# EAGLE board OLM-sensorBoardA (EAGLE 6.4)
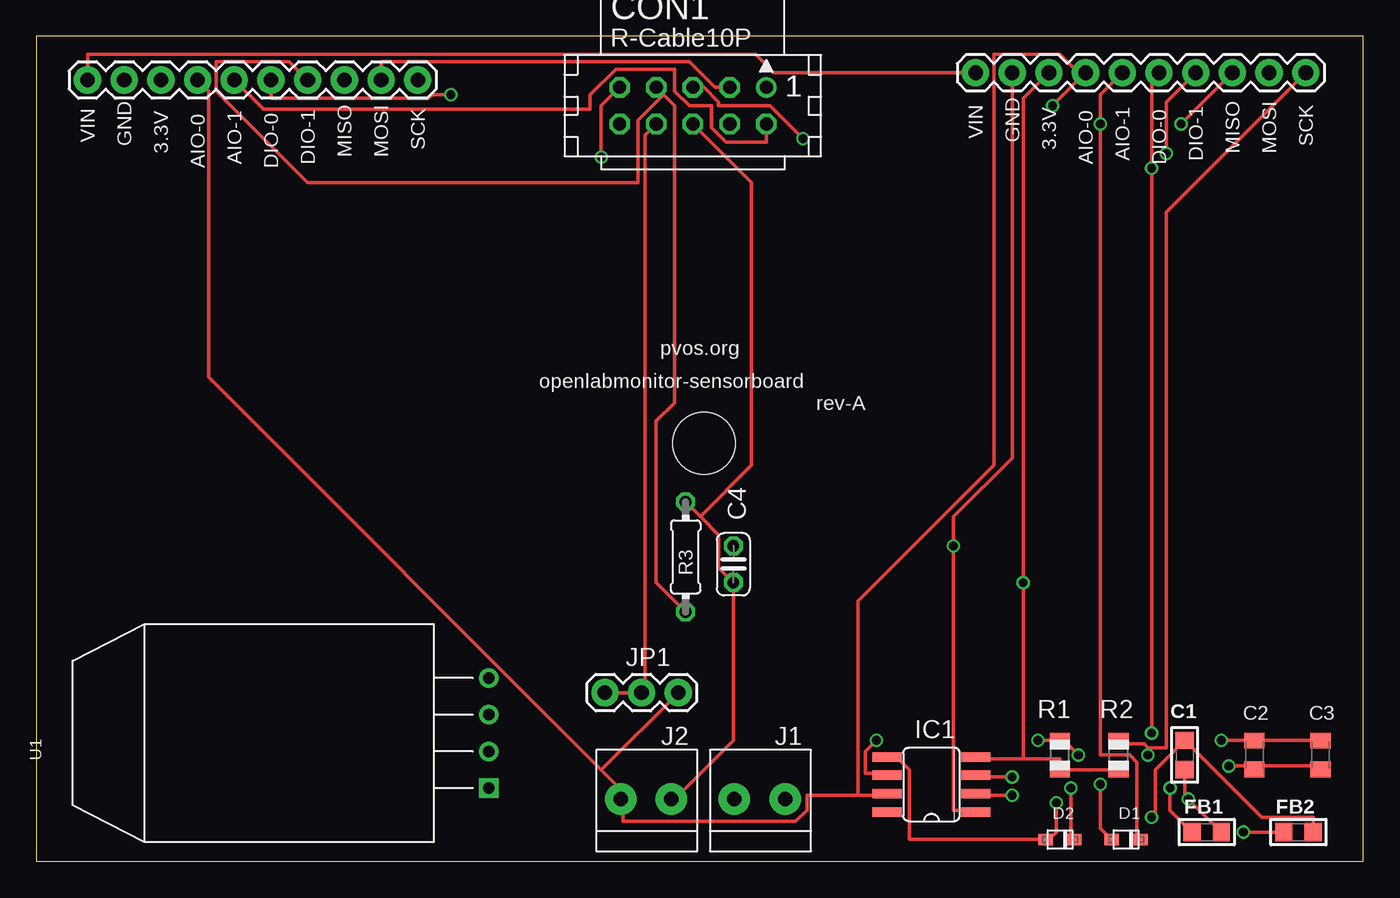
[diagram p0: board, top side]
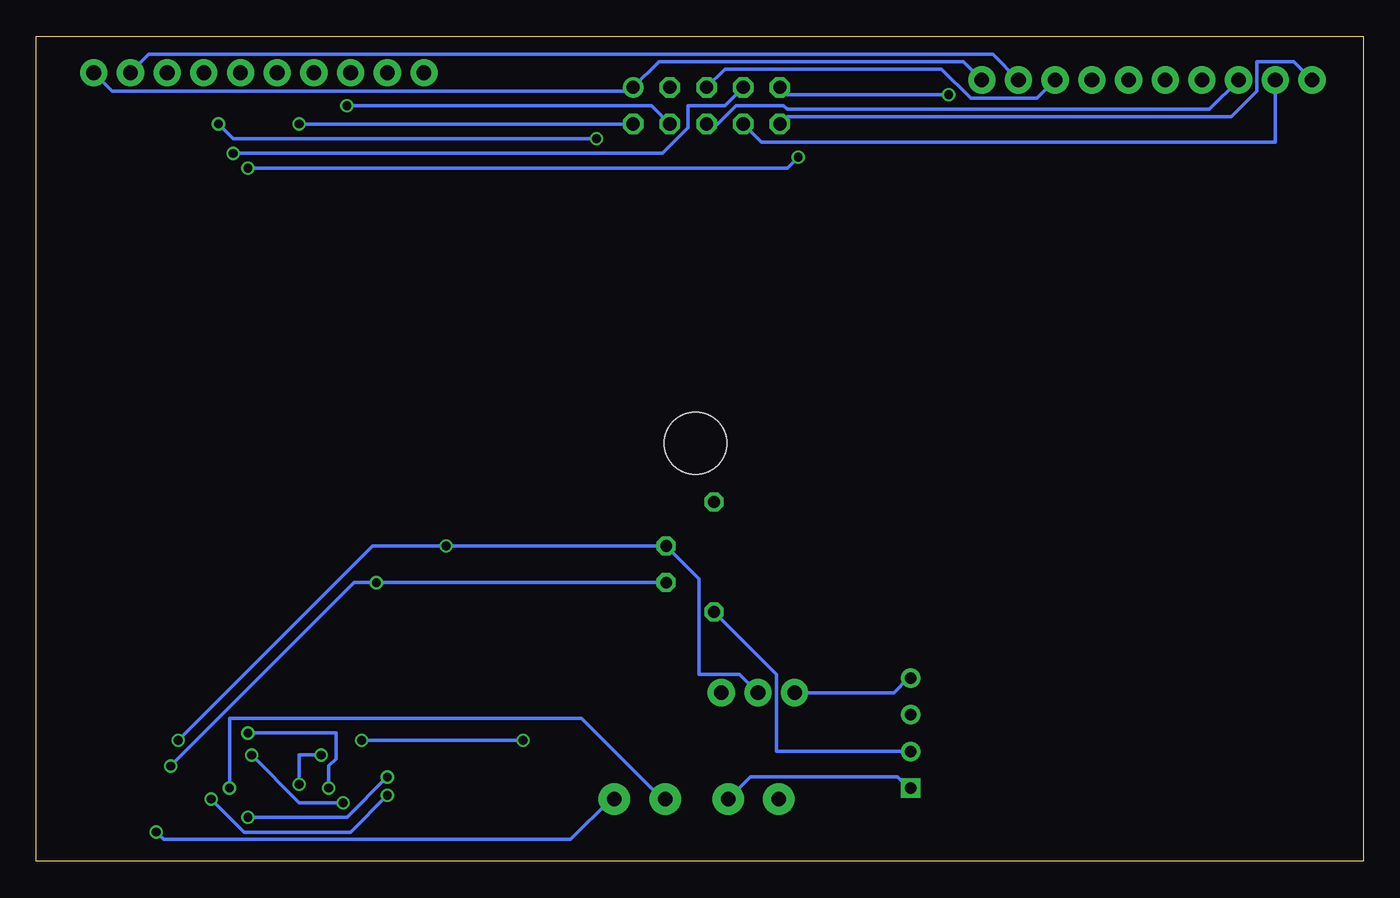
[diagram p1: board, bottom side, seen from below]

Size 91.87 x 57.14 mm. Coordinates in mm from the lower left corner, seen from the top.
Outline: 0,0 91.87,0 91.87,57.14 0,57.14 0,0
Copper layers (1*16): Top 0.035mm / dielectric 1.5mm / Bottom 0.035mm
Design rules "Fusion_eagle_rule_v1.1": minimum track width 6mil, minimum drill 12mil, track to track 6mil, track to pad 6mil, pad to pad 6mil, via to via 6mil, smd to smd 0mil, copper to edge 10mil, drill to drill 10mil, minimum pad ring 10mil, minimum via ring 6mil, stop-mask expansion 2mil, vias tented up to drill 100mil, thermal gap 10mil
Holes 4.32 mm at 46.23,28.96

## Footprints (pad centres in the part's own frame; a part is rotated, then mirrored left to right if it is on the bottom)
_0805 = smd 1.2 x 1.3: 1 -1.016,0; 2 1.016,0
C0805K = smd 1.1 x 1.4: 1 -1,0; 2 1,0
C025-024X044 = drill 0.813 octagon: 1 -1.27,0; 2 1.27,0
CON10L = drill 0.914: 1 5.08,1.27 | drill 0.914 octagon: 2 5.08,-1.27; 3 2.54,1.27; 4 2.54,-1.27; 5 0,1.27; 6 0,-1.27; 7 -2.54,1.27; 8 -2.54,-1.27; 9 -5.08,1.27; 10 -5.08,-1.27
SOD-323F = smd 1 x 0.8: A -1,0; C 1,0
SO08 = smd 0.66 x 2.032: 1 -1.905,-3.073; 2 -0.635,-3.073; 3 0.635,-3.073; 4 1.905,-3.073; 5 1.905,3.073; 6 0.635,3.073; 7 -0.635,3.073; 8 -1.905,3.073
1X2-3.5MM = drill 1 pad 2.184: 1 1.8,0; 2 -1.7,0
1X03 = drill 1.016 pad 1.88: 1 0,0; 2 2.54,0; 3 5.08,0
1X10 = drill 1.016 pad 1.88: 1 0,0; 2 2.54,0; 3 5.08,0; 4 7.62,0; 5 10.16,0; 6 12.7,0; 7 15.24,0; 8 17.78,0; 9 20.32,0; 10 22.86,0
R0805 = smd 1.1 x 1.4: 1 -1,0; 2 1,0
0204/7 = drill 0.813 octagon: 1 -3.81,0; 2 3.81,0
AM2302 = drill 0.8 pad 1.35 square: P$1 -3.81,-13.8 | drill 0.8 pad 1.35: P$2 -1.27,-13.8; P$3 1.27,-13.8; P$4 3.81,-13.8

## Placement (x,y rotation side)
C1  0.01µF  [_0805]  79.5,7.37 90 top
C2  10uF  [C0805K]  84.33,7.37 90 top
C3  10uF  [C0805K]  88.9,7.37 90 top
C4  0.1µ  [C025-024X044]  48.26,20.57 90 top
CON1  [CON10L]  45.47,52.32 0 top
D1  1N4148  [SOD-323F]  75.44,1.52 0 top
D2  1n4148  [SOD-323F]  70.87,1.52 0 top
FB1  Ferrite  [_0805]  81.03,2.03 0 top
FB2  Ferrite  [_0805]  87.38,2.03 0 top
IC1  MAX31855  [SO08]  61.98,5.33 90 top
J1  1X2-3.5MM  [1X2-3.5MM]  50.04,4.32 0 top
J2  1X2-3.5MM  [1X2-3.5MM]  42.16,4.32 0 top
JP1  [1X03]  39.37,11.68 0 top
JP2  M10"  [1X10]  65.02,54.61 0 top
JP3  M10"  [1X10]  3.56,54.1 0 top
R1  10K  [R0805]  70.87,7.37 90 top
R2  10K  [R0805]  74.93,7.37 90 top
R3  10k  [0204/7]  44.96,21.08 270 top
U1  AM2302  [AM2302]  17.53,8.89 90 top

## Library data of the parts
C1 FB1 FB2 = microbuilder
C2 C3 D1 D2 IC1 J1 J2 R1 R2 = adafruit
C4 = resistor
CON1 = con-harting; OC_FARNELL: unknown; OC_NEWARK: unknown
JP1-JP3 = SparkFun-Connectors
R3 = rcl
U1 = sensor

## Nets
+3V3: C2.1 C3.1 C4.1 CON1.6 IC1.4 J2.1 JP2.3 JP3.3 R1.1 R2.1 R3.1 U1.P$1
AIO-0: CON1.4 IC1.7 J2.2 JP1.3 JP2.4 JP3.4
AIO-1: CON1.2 D1.C JP2.5 JP3.5
CS: D1.A IC1.6 R1.2
DIO-0: CON1.9 D2.C JP2.6 JP3.6
DIO-1: CON1.7 JP2.7 JP3.7 R3.2 U1.P$2
GND: C2.2 C3.2 C4.2 CON1.8 IC1.1 JP1.1 JP1.2 JP2.2 JP3.2 U1.P$4
MISO: CON1.5 JP2.8 JP3.8
MOSI: CON1.3 JP2.9 JP3.9
N$1: FB1.1 J1.2
N$4: C1.1 FB1.2 IC1.2
N$5: FB2.1 J1.1
N$6: C1.2 FB2.2 IC1.3
SCK: CON1.1 D2.A IC1.5 JP2.10 JP3.10 R2.2
VIN: CON1.10 JP2.1 JP3.1

## Tracks (layer width: path | path; a pad name or v marks a point on that pad's centre or on a via)
+3V3  (via drill 0.61)
  Top 0.254: R2.1 74.93,6.35 70.87,6.35 R1.1 70.87,7.11 68.33,7.11 | 68.33,7.11 65.28,7.11 IC1.4 | JP2.3 68.33,52.83 v68.33,19.3 68.33,7.11 | 84.33,6.6 88.9,6.6 C3.1 | 45.97,23.88 47.24,22.61 47.24,20.32 C4.1 48.26,8.38 44.2,4.32 J2.1 | 45.97,23.88 R3.1 | CON1.6 49.53,46.99 49.53,27.43 45.97,23.88 | v82.55,6.6 84.33,6.6 | 84.33,6.6 C2.1
  Bottom 0.254: U1.P$1 31.5,5.08 32.26,5.84 42.42,5.84 43.94,4.32 J2.1 | v82.55,6.6 69.85,19.3 v68.33,19.3 C4.1 | JP3.3 10.67,52.07 39.88,52.07 40.13,52.32 43.43,52.32 44.7,51.05 CON1.6
AIO-0  (via drill 0.61)
  Top 0.254: 72.39,54.36 v70.36,52.32 | 56.9,4.57 53.34,4.57 53.34,3.56 52.58,2.79 40.64,2.79 40.64,4.32 J2.2 40.39,4.32 40.39,5.08 39.12,6.35 | 56.9,4.57 58.67,4.57 IC1.7 | JP3.4 11.94,53.34 11.94,33.53 39.12,6.35 | 39.12,6.35 JP1.3 | 72.39,54.36 70.87,55.88 66.29,55.88 66.29,27.43 56.9,18.03 56.9,4.57 | 72.39,54.36 JP2.4
  Bottom 0.254: CON1.4 49.28,52.32 v70.36,52.32
AIO-1  (via drill 0.61)
  Top 0.254: JP2.5 73.66,53.09 v73.66,51.05 73.66,7.37 75.69,7.37 76.2,6.86 76.2,1.52 D1.C | JP3.5 15.75,52.07 38.35,52.07 38.35,53.09 40.13,54.86 44.2,54.86 44.2,53.34 45.21,52.32 46.74,52.32 46.74,50.8 47.75,49.78 50.55,49.78 CON1.2
  Bottom 0.254: v73.66,51.05 CON1.2
CS  (via drill 0.61)
  Top 0.254: v73.66,5.33 73.66,2.29 74.42,1.52 D1.A | v72.14,7.37 71.37,8.13 70.87,8.13 R1.2 70.87,8.38 v69.34,8.38 | v58.17,8.38 57.4,7.62 57.4,6.1 58.67,6.1 IC1.6
  Bottom 0.254: v73.66,5.33 73.66,7.37 v72.14,7.37 | v69.34,8.38 v58.17,8.38
DIO-0  (via drill 0.61)
  Top 0.254: v28.7,53.09 27.43,53.09 27.18,52.83 16.26,52.83 JP3.6 | v71.63,5.08 71.63,1.52 D2.C | v77.22,8.89 v77.22,48.01 77.22,54.1 JP2.6 | CON1.9 39.12,52.32 v39.12,48.77
  Bottom 0.254: CON1.9 39.88,53.09 v28.7,53.09 | v71.63,5.08 71.63,6.6 71.12,7.11 71.12,8.89 v77.22,8.89 | v39.12,48.77 39.88,48.01 v77.22,48.01
DIO-1  (via drill 0.61)
  Top 0.254: 43.43,53.09 44.2,52.32 44.2,31.75 42.93,30.48 42.93,19.3 R3.2 | 43.43,53.09 CON1.7 | JP3.7 17.53,55.37 12.45,55.37 12.45,53.34 18.8,46.99 41.66,46.99 41.66,51.31 43.43,53.09 | JP2.7 78.23,52.58 v78.23,49.02
  Bottom 0.254: R3.2 40.64,12.95 40.64,7.62 U1.P$2 | v78.23,49.02 48.51,49.02 46.74,50.8 46.74,52.32 44.2,52.32 CON1.7
GND  (via drill 0.61)
  Top 0.254: JP2.2 67.56,27.94 63.5,23.88 v63.5,21.84 63.5,3.56 65.02,3.56 IC1.1 | 84.33,8.38 88.9,8.38 C3.2 | CON1.8 42.16,50.29 42.16,11.94 JP1.2 JP1.1 | v82.04,8.38 84.33,8.38 | 84.33,8.38 C2.2
  Bottom 0.254: JP1.1 32.51,11.68 31.5,12.7 U1.P$4 | JP1.2 43.18,12.95 45.97,12.95 45.97,19.56 C4.2 v63.5,21.84 68.58,21.84 v82.04,8.38 | JP3.2 6.1,49.78 41.66,49.78 CON1.8
MISO  (via drill 0.61)
  Top 0.254: v79.25,51.05 JP2.8 | v53.09,50.04 50.8,52.32 47.24,52.32 47.24,52.58 46.23,53.59 CON1.5
  Bottom 0.254: CON1.5 44.2,54.86 29.21,54.86 27.18,52.83 22.61,52.83 JP3.8 | v79.25,51.05 78.23,50.04 v53.09,50.04
MOSI
  Top 0.254: CON1.3 46.99,53.59 45.21,55.37 23.88,55.37 JP3.9
  Bottom 0.254: JP2.9 84.07,55.88 25.65,55.88 JP3.9
N$1  (via drill 0.61)
  Top 0.254: FB1.1 78.49,3.56 v78.49,5.08
  Bottom 0.254: v78.49,5.08 78.49,9.91 54.1,9.91 48.51,4.32 J1.2
N$4  (via drill 0.61)
  Top 0.254: FB1.2 v79.76,4.32 79.5,4.57 C1.1 | v67.56,4.57 65.28,4.57 IC1.2
  Bottom 0.254: v67.56,4.57 70.1,2.03 77.47,2.03 v79.76,4.32
N$5  (via drill 0.61)
  Top 0.254: v83.57,2.03 FB2.1
  Bottom 0.254: v83.57,2.03 83.06,1.52 54.86,1.52 52.07,4.32 J1.1
N$6  (via drill 0.61)
  Top 0.254: FB2.2 88.39,3.05 84.84,3.05 C1.2 77.47,6.35 77.47,3.3 v77.22,3.05 | v67.56,5.84 65.28,5.84 IC1.3
  Bottom 0.254: v67.56,5.84 70.36,3.05 v77.22,3.05
SCK  (via drill 0.61)
  Top 0.254: IC1.5 58.93,7.11 59.69,7.11 60.45,6.35 60.45,1.52 D2.A 70.1,1.52 70.61,2.03 v70.61,4.06 | 76.96,7.87 76.71,8.13 74.93,8.13 R2.2 | 76.96,7.87 78.23,7.87 78.23,44.96 JP2.10 | 76.96,7.87 v76.96,7.37
  Bottom 0.254: JP3.10 27.69,55.37 48.77,55.37 CON1.1 50.8,53.34 86.61,53.34 JP2.10 | v70.61,4.06 73.66,4.06 v76.96,7.37
VIN
  Top 0.254: JP2.1 51.05,54.61 49.78,55.88 3.56,55.88 JP3.1
  Bottom 0.254: CON1.10 39.88,51.56 9.14,51.56 7.37,53.34 7.37,55.37 4.83,55.37 JP3.1

## Text on the board
tPlace: VIN | GND | VIN | GND | SCK | 3.3V | MISO | MOSI | SCK | 3.3V | AIO-1 | DIO-1 | MISO | MOSI | AIO-0 | AIO-1 | DIO-0 | DIO-1 | AIO-0 | DIO-0 | pvos.org | openlabmonitor-sensorboard | rev-A